# EAGLE board Zwaard_met_Triple7Seg-with-enc-R3 (EAGLE 7.7.0)
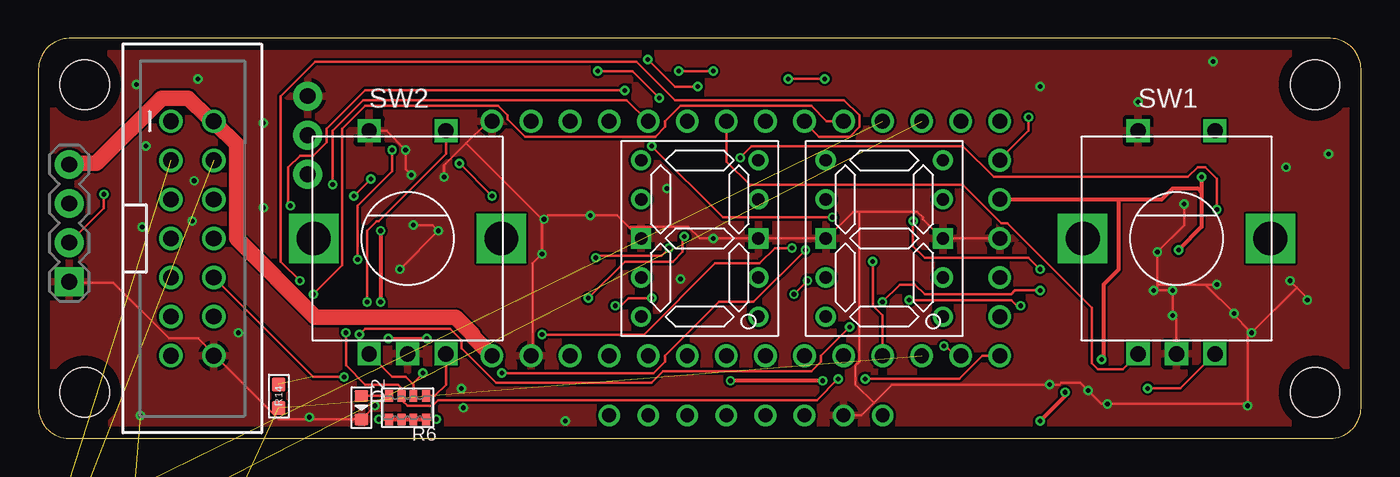
[diagram p0: board, top side]
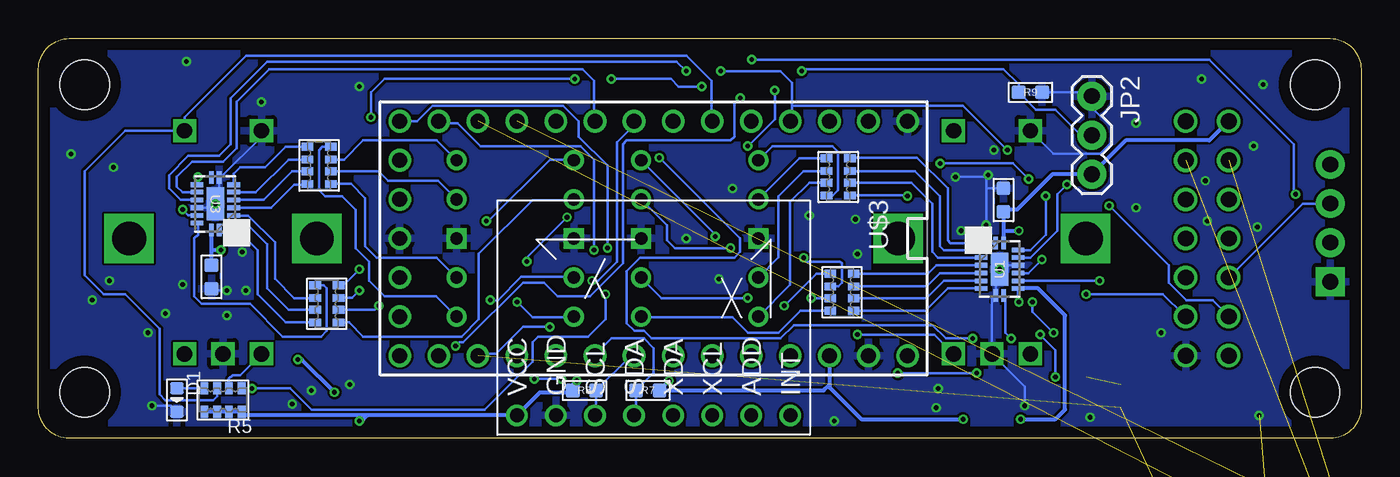
[diagram p1: board, bottom side, seen from below]

Size 86 x 26 mm. Coordinates in mm from the lower left corner, seen from the top.
Outline: 2,0 84,0 arc90 86,2 86,24 arc90 84,26 2,26 arc90 0,24 0,2 arc90 2,0
Copper layers (1*16): Top 0.035mm / dielectric 1.5mm / Bottom 0.035mm
Design rules "ITEADstudio_DRC *": minimum track width 6mil, minimum drill 12mil, track to track 6mil, track to pad 6mil, pad to pad 6mil, via to via 6mil, smd to smd 0mil, copper to edge 30mil, drill to drill 10mil, minimum pad ring 10mil, minimum via ring 6mil, stop-mask expansion 2mil, vias tented up to drill 100mil, thermal gap 10mil
Net classes: 0 default: width 0.178 mm; 2 LEDPOWER: width 0.254 mm; 3 FATLED: width 1 mm
Holes 3.2 mm at 3,3 83,3 3,23 83,23

## Footprints (pad centres in the part's own frame; a part is rotated, then mirrored left to right if it is on the bottom)
C0603 = smd 0.889 x 0.889: 1 -0.762,0; 2 0.762,0
LED0603 = smd 0.762 x 0.889: + -0.762,0; - 0.762,0
1X04 = drill 1.016 pad 1.88 square: 1 0,0 | drill 1.016 pad 1.88: 2 2.54,0; 3 5.08,0; 4 7.62,0
1X03 = drill 1.016 pad 1.88: 1 0,0; 2 2.54,0; 3 5.08,0
R1206-8 = smd 0.508 x 0.762: 1 -1.206,-0.762; 2 -0.381,-0.762; 3 0.381,-0.762; 4 1.206,-0.762; 5 1.206,0.762; 6 0.381,0.762; 7 -0.381,0.762; 8 -1.206,0.762
R0603 = smd 0.889 x 0.889: 1 -0.762,0; 2 0.762,0
ALPS_EC12E_SW = drill 1 square: A -2.5,-7.5; B 2.5,-7.5; C 0,-7.5; D -2.5,7; E 2.5,7 | drill 2.2 square: GND1 -6.1,0; GND2 6.1,0
QFN50P250X350X100-17N = smd 0.305 x 0.813: 1 -0.254,1.702; 8 -0.254,-1.702; 9 0.254,-1.702; 16 0.254,1.702 | smd 0.813 x 0.305: 2 -1.194,1.245; 3 -1.194,0.762; 4 -1.194,0.254; 5 -1.194,-0.254; 6 -1.194,-0.762; 7 -1.194,-1.245; 10 1.194,-1.245; 11 1.194,-0.762; 12 1.194,-0.254; 13 1.194,0.254; 14 1.194,0.762; 15 1.194,1.245 | smd 1.143 x 2.159: 17 0,0
7SEG_500X400MIL = drill 0.8: 1 -3.81,5.08; 2 -3.81,2.54; 3 -3.81,-2.54; 4 -3.81,-5.08; 5 3.81,-5.08; 6 3.81,-2.54; 7 3.81,2.54; 8 3.81,5.08 | drill 0.8 square: GNDA -3.81,0; GNDB 3.81,0
TEENSY_3.0-3.2&LC_OUTER_ROW = drill 0.965: 0 -7.62,13.97; 1 -7.62,11.43; 2 -7.62,8.89; 3 -7.62,6.35; 3.3V 7.62,11.43; 3.3V1 -2.54,-16.51; 4 -7.62,3.81; 5 -7.62,1.27; 6 -7.62,-1.27; 7 -7.62,-3.81; 8 -7.62,-6.35; 9 -7.62,-8.89; 10 -7.62,-11.43; 11 -7.62,-13.97; 12 -7.62,-16.51; 13 7.62,-16.51; 14/A0 7.62,-13.97; 15/A1 7.62,-11.43; 16/A2 7.62,-8.89; 17/A3 7.62,-6.35; 18/A4 7.62,-3.81; 19/A5 7.62,-1.27; 20/A6 7.62,1.27; 21/A7 7.62,3.81; 22/A8 7.62,6.35; 23/A9 7.62,8.89; AGND 7.62,13.97; GND -7.62,16.51; GND1 0,-16.51; PGM 2.54,-16.51; RESET/DAC 5.08,-16.51; VBAT -5.08,-16.51; VIN 7.62,16.51
ACCELBOARD = drill 0.9: ADD -6.35,0; GND 6.35,0; INT -8.89,0; SCL 3.81,0; SDA 1.27,0; VCC 8.89,0; XCL -3.81,0; XDA -1.27,0
2X70SHROUDED_LOCK = drill 1.016: 1 -1.397,7.62; 2 1.397,7.62; 3 -1.397,5.08; 4 1.397,5.08; 5 -1.397,2.54; 6 1.397,2.54; 7 -1.397,0; 8 1.397,0; 9 -1.397,-2.54; 10 1.397,-2.54; 11 -1.397,-5.08; 12 1.397,-5.08; 13 -1.397,-7.62; 14 1.397,-7.62

## Placement (x,y rotation side)
C1  100n  [C0603]  23.25,15.5 90 bottom
C2  100n  [C0603]  74.75,10.5 270 bottom
D1  [LED0603]  77,2.5 270 bottom
D2  [LED0603]  21,2 270 top
JP1  [1X04]  2,10.19 90 top
JP2  [1X03]  17.5,22.25 270 bottom
R1  56  [R1206-8]  34,17 90 bottom
R2  56  [R1206-8]  33.75,9.5 90 bottom
R3  56  [R1206-8]  67.25,8.75 270 bottom
R4  56  [R1206-8]  67.75,17.75 270 bottom
R5  [R1206-8]  74,2.5 180 bottom
R6  [R1206-8]  24,2 180 top
R7  2k  [R0603]  46.38,3.12 180 bottom
R8  2k  [R0603]  50.5,3.12 0 bottom
R9  10k  [R0603]  21.5,22.5 180 bottom
R10  10k  [R0603]  0,-6.62 0 top  (outside the outline)
R11  10k  [R0603]  0,-9.25 0 top  (outside the outline)
R12  10k  [R0603]  6.5,-9.38 0 top  (outside the outline)
R13  10k  [R0603]  9.62,-9.38 0 top  (outside the outline)
R14  10k  [R0603]  15.62,2.75 90 top
SW1  EC12E_SW  [ALPS_EC12E_SW]  74,13 0 top
SW2  EC12E_SW  [ALPS_EC12E_SW]  24,13 0 top
U1  74HCT595BQ  [QFN50P250X350X100-17N]  23.5,11 0 bottom
U3  74HCT595BQ  [QFN50P250X350X100-17N]  74.5,15.25 180 bottom
U$1  7.1SEG  [7SEG_500X400MIL]  43,13 0 top
U$3  TEENSY_LC_OUTER_ROW  [TEENSY_3.0-3.2&LC_OUTER_ROW]  46,13 270 bottom
U$4  7.1SEG  [7SEG_500X400MIL]  55,13 0 top
U$6  ACCELERO  [ACCELBOARD]  46,1.5 180 bottom
U$7  M07X2  [2X70SHROUDED_LOCK]  10,13 0 top

## Library data of the parts
C1 C2 D1 D2 R1-R14 = OPL
JP1 JP2 = SparkFun-Connectors
SW1 SW2 = switch-alps; MPN: EC12E2424407; OC_FARNELL: 1520813; OC_NEWARK: 74M1068
U1 U3 = EurorackModularParts; MPN: 74HCT595BQ; OC_FARNELL: 2164865; OC_NEWARK: 55W4682; PACKAGE: QFN-16; SUPPLIER: NXP
U$1 U$4 = 7Seg
U$3 = Teensy_3_and_LC_Series_Boards_v1.4
U$6 U$7 = zephod-components

## Nets
3.3V [LEDPOWER]: C1.1 C2.1 JP2.3 R5.5 R5.6 R5.7 R5.8 R6.5 R6.6 R6.7 R6.8 R7.1 R8.1 U1.10 U1.16 U3.10 U3.16 U$3.3.3V U$3.3.3V1 U$6.VCC U$7.1
5V [FATLED]: JP1.4 U$3.VIN U$7.2
26/A12/DAC: U$3.RESET/DAC
A: R1.8 U$1.1
A2: R3.8 U$4.1
B: R1.5 U$1.2
B2: R3.5 U$4.2
C: R1.6 U$1.3
C2: R3.6 U$4.3
D: R1.7 U$1.4
D2: R3.7 U$4.4
E: R2.5 U$1.6
E2: R4.5 U$4.6
ENC1_A: R5.2 SW1.A U$3.5
ENC1_B: R5.1 SW1.B U$3.6
ENC1_S: R5.3 SW1.E U$3.4
ENC2_A: R6.2 SW2.A U$3.11
ENC2_B: R6.1 SW2.B U$3.12
ENC2_S: R6.3 SW2.E U$3.13
F: R2.6 U$1.7
F2: R4.6 U$4.7
G: R2.7 U$1.8
G2: R4.7 U$4.8
GND: C1.2 C2.2 D1.- D2.- JP1.1 JP2.1 R9.1 R12.1 SW1.C SW1.D SW2.C SW2.D U1.8 U1.13 U1.17 U3.8 U3.13 U3.17 U$1.GNDA U$1.GNDB U$3.AGND U$3.GND U$3.GND1 U$4.GNDA U$4.GNDB U$6.GND U$7.14
H: R2.8 U$1.5
H2: R4.8 U$4.5
LED1: R10.1 U$3.9
LED1OUT: R10.2 U$7.3
LED2: R11.1 U$3.10
LED2OUT: R11.2 U$7.4
LED_DATA_OUT: JP1.2 U$3.VBAT
LED_NAAR_RING: JP1.3 U$7.9
LEDCLK: U1.11 U3.11 U$3.7
LEDDAT: U1.14 U$3.3
LEDLATCH: U1.12 U3.12 U$3.2
MIDI_RX: U$3.0
MIDI_TX: U$3.1
N$1: D1.+ R5.4
N$2: D2.+ R6.4
N$3: U$3.PGM
N$4: R1.4 U1.1
N$5: R1.3 U1.2
N$6: R1.2 U1.3
N$7: R2.4 U1.4
N$8: R2.3 U1.5
N$9: R2.2 U1.6
N$10: R2.1 U1.7
N$11: R1.1 U1.15
N$12: R3.4 U3.1
N$13: R3.3 U3.2
N$14: R3.2 U3.3
N$15: R4.4 U3.4
N$16: R4.3 U3.5
N$17: R4.2 U3.6
N$18: R4.1 U3.7
N$19: R3.1 U3.15
N$20: R12.2 R13.1
POT1: R14.2 U$7.10
POT_1_IN: R13.2 R14.1 U$3.15/A1
POT_2: U$3.16/A2 U$7.11
SCL: R8.2 U$3.19/A5 U$6.SCL
SDA: R7.2 U$3.18/A4 U$6.SDA
SEG2DAT: U1.9 U3.14
SOFTPOT: JP2.2 R9.2 U$3.14/A0
SWITCH: U$3.8 U$7.12

## Tracks (layer width: path | path; a pad name or v marks a point on that pad's centre or on a via)
3.3V  (via drill 0.3)
  Top 0.254: v25.88,1.25 R6.8 R6.7 R6.6 R6.5 22.14,1.24 v22.12,1.25 | v75.62,17 75.62,16 | 75.62,16 75.62,13.75 v74.12,12.25 | v51,3.75 v45,3.75 | v22.25,13.5 v22.25,8.88 | U$3.3.3V1 70.23,15.54 | 70.23,15.54 73.04,15.54 73.75,16.25 75.38,16.25 75.62,16 | 70.23,15.54 70.23,10.98 69.25,10 69.25,5.25 v69.12,5.12 | v66.75,3 66.75,2.75 v65.12,1.12
  Bottom 0.254: R5.5 R5.6 R5.7 R5.8 72.56,1.5 65.12,1.5 | U$3.3.3V 34.57,3.5 | 34.57,3.5 34.57,3.32 32.5,1.25 v25.88,1.25 | C2.1 74.75,12.25 | 74.75,12.25 U3.16 | U3.10 75.69,16.93 v75.62,17 | v74.12,12.25 74.75,12.25 | 64.62,1.5 U$6.VCC 53.39,3 51.39,3 R8.1 51.26,3.49 v51,3.75 | 64.62,1.5 65.12,1.5 | U$7.1 8.63,20.62 9.88,19.38 15.29,19.38 JP2.3 20.08,17.17 22.38,14.88 23.11,14.88 C1.1 23.25,13.5 | 23.25,13.5 U1.16 | v45,3.75 45,3.74 R7.1 34.95,3.12 34.57,3.5 | v22.12,1.25 19.88,1.25 19.25,1.88 19.25,8 21,9.75 U1.10 22.25,9.7 v22.25,8.88 | 23.25,13.5 v22.25,13.5 | 65.12,1.5 v65.12,1.12 65,1.12 64.62,1.5 | v69.12,5.12 68.88,5.12 v66.75,3
5V
  Top 1: U$3.VIN 29.38,5.5 28.25,6.62 28.25,6.75 27.12,7.88 18,7.88 12.88,13 12.88,19.12 11.5,20.5 U$7.2 11,20.88 9.75,22.12 8,22.12 3.75,17.88 2,17.88 JP1.4
A
  Bottom 0.178: R1.8 34.33,15.79 34,16.12 34,18.62 34.38,19 38.27,19 U$1.1
A2  (via drill 0.3)
  Top 0.178: v65.12,11 64.38,11.75 57.62,11.75 56.88,12.5 v56.88,14.12
  Bottom 0.178: R3.8 66.17,9.96 v65.12,11 | v56.88,14.12 56.75,14.12 52.75,18.12 51.23,18.12 U$4.1
B
  Bottom 0.178: R1.5 36.52,18.21 U$1.2
B2
  Bottom 0.178: R3.5 65.79,7.54 64.88,6.62 58.5,6.62 57.38,7.75 57.38,12 53.88,15.5 51.23,15.5 U$4.2
C
  Bottom 0.178: R1.6 36.24,17.38 37.88,15.75 37.88,11.78 U$1.3
C2  (via drill 0.3)
  Top 0.178: v63.88,8.62 63.62,8.62 63.25,9 v56.62,9
  Bottom 0.178: R3.6 64.13,8.37 v63.88,8.62 | v56.62,9 56.12,9 54.62,10.5 51.23,10.5 U$4.3
D
  Bottom 0.178: R1.7 35.88,16.62 37.12,15.38 37.12,9.98 U$1.4
D2  (via drill 0.3)
  Top 0.178: v65.12,9.62 63.5,9.62 63.25,9.38 57.62,9.38 57,10 56,10 v54.88,8.88
  Bottom 0.178: R3.7 65.62,9.13 v65.12,9.62 | v54.88,8.88 53.88,7.88 51.23,7.88 U$4.4
E  (via drill 0.3)
  Top 0.178: v37.5,8.62 37.88,8.62 38.38,9.12 v39.88,9.12
  Bottom 0.178: R2.5 35.42,10.71 v37.5,8.62 | v39.88,9.12 45.48,9.12 U$1.6
E2
  Bottom 0.178: R4.5 65.67,16.54 64.75,15.62 64.75,12.5 64,11.75 60.1,11.75 U$4.6
ENC1_A
  Top 0.178: SW1.A 70.5,4.5 68.88,4.5 68.5,4.88 68.5,8.5 63,14 62.62,14 60.12,16.5 46.25,16.5 44.75,18 44.75,20.5 U$3.5
  Bottom 0.178: R5.2 73.62,3.88 73.38,4.12 72.88,4.12 SW1.A
ENC1_B  (via drill 0.3)
  Top 0.178: v72.12,3.25 74.25,3.25 SW1.B | v49.12,9.38 v50,10.25
  Bottom 0.178: R5.1 72.14,3.26 v72.12,3.25 69.62,3.25 68.25,1.88 57,1.88 53.88,5 53.88,6.25 53.5,6.62 50.25,6.62 49.12,7.75 v49.12,9.38 | v50,10.25 49.62,10.25 48.38,11.5 48.38,19.25 47.38,20.25 47.38,20.5 U$3.6
ENC1_S
  Bottom 0.178: U$3.4 42.25,20.68 42.25,23.25 43.88,24.88 72.5,24.88 76.5,20.88 SW1.E 80.38,20 83,17.38 83,10.62 81.75,9.38 80.38,9.38 78.12,7.12 78.12,2.88 77.75,2.5 74.62,2.5 74.38,2.74 R5.3
ENC2_A  (via drill 0.3)
  Top 0.178: R6.2 24.38,3.49 24.31,3.56 | 24.31,3.56 23.88,4 23,4 SW2.A | v49.88,12.25 46.5,8.88 44.25,8.88 40.75,5.38 40.75,5 40,4.25 v30.12,4.25 | 24.31,3.56 v25,4.25
  Bottom 0.178: v49.88,12.25 49.88,18.12 50.75,19 57.25,19 58.75,20.5 59.88,20.5 U$3.11 | v25,4.25 v30.12,4.25
ENC2_B  (via drill 0.3)
  Top 0.178: R6.1 25.76,2.76 26.5,3.5 SW2.B | v49,12.38 47.88,12.38 46.88,11.38 44,11.38 39.38,6.75 v32.75,6.75
  Bottom 0.178: v49,12.38 49,17.75 50.88,19.62 50.88,20.62 51.88,21.62 60.38,21.62 61.38,20.62 U$3.12 | v32.75,6.75 27.75,6.75 SW2.B
ENC2_S  (via drill 0.3)
  Top 0.178: 20,7 v20,6.88 20,4.75 21.25,3.5 23.38,3.5 23.62,3.26 R6.3 23.62,2.5 24,2.12 25.62,2.12 26,2.5 50.62,2.5 v52,3.88 | v53.75,3.88 59.88,3.88 61.38,5.38 U$3.13 | SW2.E 26.5,18.5 22.12,14.12 22,14.12 21.38,13.5 v21.38,8.88
  Bottom 0.178: v52,3.88 v53.75,3.88 | v21.38,8.88 21.38,8.25 v20,6.88
F  (via drill 0.3)
  Top 0.178: v36.25,11.75 36.38,11.88 40.5,11.88 v41,12.38
  Bottom 0.178: R2.6 33.99,9.88 33.75,10.12 33.75,11.38 33.88,11.5 36,11.5 v36.25,11.75 | v41,12.38 44.62,12.38 45.12,12.88 45.12,13.86 U$1.7
F2
  Bottom 0.178: R4.6 63.87,17.37 63.25,16.75 60.02,16.75 U$4.7
G  (via drill 0.3)
  Top 0.178: v35.75,9.12 38.12,11.5 41.25,11.5 41.88,12.12 41.88,13 v42,13.12
  Bottom 0.178: R2.7 v35.74,9.12 v35.75,9.12 | v42,13.12 42,13.27 U$1.8
G2
  Bottom 0.178: R4.7 66.12,18.13 64.88,19.38 60.1,19.38 U$4.8
GND  (via drill 0.3)  (1 unrouted)
  Top 0.178: 81.81,9.81 82.5,9.12 v82.5,9 | 81.81,9.81 v81.38,10.25 | 72.75,9.62 v73.75,9.62 v73.75,8 74,7.75 SW1.C | 72.75,9.62 72.75,10 | 72.75,10 v72.75,12.12 74.5,13.88 U3.17 | 72.75,9.62 v72.5,9.62 | 72.75,10 75.88,10 | 75.88,10 v76.62,10 | 75.88,10 v77.75,8.12 77.62,8.12 v78.88,6.88 | v78.88,6.88 81.81,9.81 | 78.62,2.25 78.62,7 v78.88,6.88 | 78.62,2.25 v69.5,2.25 69.12,2.25 v68.25,3.12 67.75,3.62 66.5,3.62 66.38,3.5 v65.75,3.5 55.5,3.5 54.31,2.31 | 78.62,2.25 v78.62,2.12 | U$6.GND 53.5,1.5 54.31,2.31 | U$3.GND1 U$4.GNDB 58.75,13 57.5,14.25 57.5,14.38 57.12,14.75 53.38,14.75 | v32.88,14.25 32.75,14.12 v32.75,12 32.12,11.38 32.12,5.5 U$3.AGND | v32.88,14.25 33.12,14.5 v35.88,14.5 37.62,14.5 38.44,13.69 | 38.44,13.69 39.12,13 U$1.GNDA | 38.44,13.69 38.5,13.75 42.25,13.75 43,13 U$1.GNDB U$4.GNDA 51.25,13 53,14.75 53.38,14.75 | D2.- 15.62,1.25 11.5,5.38 U$7.14 11.38,5.5 10.38,6.5 8.5,6.5 4.88,10.12 2,10.12 JP1.1 | v24.38,13.88 25.62,13.88 v26,13.5 U1.17 | v24.25,17.12 23.88,17.5 v23.88,18.75 22.62,20 SW2.D | 27.81,19.19 26.38,17.75 v26.38,17 | 27.81,19.19 29.12,20.5 29.38,20.5 U$3.GND | v21.88,2.12 D2.- | D2.- | 27.81,19.19 32.75,14.25 v32.88,14.25 | 54.31,2.31 53.12,3.5 53.12,4.75 53.38,5 53.38,14.75
  Bottom 0.178: U1.13 23.25,11.25 U1.17 | U1.17 23.5,11.12 23.75,10.88 23.75,10.62 U1.8 23.88,9.25 24,9.12 SW2.C 21.88,3.38 v21.88,2.12 | U1.17 23.62,10.88 23.5,10.88 | 75.75,15 74.75,15 U3.17 74.25,15.5 U3.8 74.12,17 71.5,19.62 SW1.D | 75.88,15 75.75,15 | v78.62,2.12 77.38,2.12 D1.- | 75.75,15 U3.13 | v73.75,9.62 74.75,9.62 C2.2 | R9.1 17.75,22.5 JP2.1 17.5,21.5 16.25,20.25 16.25,19.25 17,18.5 20,18.5 SW2.D | 24.38,17 v26.38,17 | 24.38,17 24.38,16.25 | 24.38,16.25 v24.38,13.88 | 24.38,17 v24.25,17.12 | 24.38,16.25 C1.2
  other vias: 23.5,11 74.5,15.25 65.12,22.88 71.5,21.88 40.88,16.25 43.88,13 41.75,10.38 34.25,1.12 27.62,2 27.5,3.25 17.62,1.38 13,6.88 6.75,13.75 7,19 6.38,23 10.38,23.38 14.62,20.5 14.62,15 10.12,16.75 10,14.12 76.38,24.5 83.88,18.5 81.12,17.62 6.62,1.5
  pour Bottom: -0.62,26.75 87.25,26.75 87.25,-1.5 -1.75,-1.5 -1.75,26.25
  pour Top: -0.12,27.12 87.75,27.12 87.75,-1.12 -1.25,-1.12 -1.25,26.62
H
  Bottom 0.178: R2.8 36.46,8.29 37.88,6.88 39.88,6.88 40.88,7.88 46.77,7.88 U$1.5
H2
  Bottom 0.178: R4.8 67.54,18.96 67.75,18.75 67.75,16.12 67.38,15.75 66.25,15.75 65.38,14.88 65.38,12.38 64.5,11.5 64.5,10.25 63.5,9.25 60.14,9.25 U$4.5
LED1  (1 unrouted)
LED1OUT  (1 unrouted)
LED2  (1 unrouted)
LED2OUT  (1 unrouted)
LED_DATA_OUT  (via drill 0.3)
  Top 0.178: v51.12,23.38 v48.75,23.38 | v42.88,22.88 41.38,22.88 v39.62,24.62 | v4.25,15.88 4.25,14.98 JP1.2 | U$3.VBAT 62.51,18.14 64.38,20 v64.38,20.88
  Bottom 0.178: v51.12,23.38 63.5,23.38 64.38,22.5 v64.38,20.88 | v48.75,23.38 44.88,23.38 44.38,22.88 v42.88,22.88 | v39.62,24.62 9.88,24.62 4.38,19.12 4.38,16 v4.25,15.88
LED_NAAR_RING
  Bottom 0.178: JP1.3 3.79,15.27 U$7.9
LEDCLK  (via drill 0.3)
  Top 0.178: v17,10.25 15.75,11.5 15.75,22.25 18,24.5 38.88,24.5 41.38,22 52.38,22 53.38,21 53.38,20.25 52.75,19.62 50.75,19.62 49.88,20.5 U$3.7
  Bottom 0.178: U3.11 76.64,16.01 77,16.38 77,17 76,18 74,18 73.12,18.88 73.12,21.88 71,24 50.62,24 49.88,23.25 49.88,20.68 U$3.7 | v17,10.25 22.25,10.25 U1.11
LEDDAT  (via drill 0.3)
  Top 0.178: v19.12,16.5 19.12,20 21.12,22 38.25,22 39.62,20.62 U$3.3
  Bottom 0.178: v19.12,16.5 19.75,15.88 19.75,13.5 21.5,11.75 22.25,11.75 U1.14
LEDLATCH  (via drill 0.3)
  Top 0.178: v43.88,23.88 v41.62,23.88 | v20.75,11.62 20.75,15.12 23,17.38 v23,18.75
  Bottom 0.178: U3.12 76.75,15.5 77.5,16.25 77.5,17.12 76.25,18.38 74.25,18.38 73.5,19.12 73.5,22.12 71.12,24.5 44.5,24.5 v43.88,23.88 | v41.62,23.88 37.75,23.88 37,23.12 37,21.62 | 37,21.62 37,20.73 U$3.2 | v20.75,11.62 21.62,10.75 22.25,10.75 U1.12 | v23,18.75 25.88,21.62 37,21.62
N$1
  Bottom 0.178: R5.4 D1.+
N$2
  Top 0.178: R6.4 D2.+
N$4
  Bottom 0.178: U1.1 26.7,12.7 26.88,12.88 26.88,16.25 28.88,18.25 33.2,18.25 R1.4
N$5
  Bottom 0.178: U1.2 27.12,12.24 27.38,12.5 27.38,15.75 29,17.38 R1.3
N$6
  Bottom 0.178: U1.3 27.51,11.76 27.88,12.12 27.88,15.25 29.25,16.62 R1.2
N$7
  Bottom 0.178: U1.4 27.62,11.25 28.17,10.71 R2.4
N$8
  Bottom 0.178: R2.3 28.24,9.88 27.38,10.75 U1.5
N$9
  Bottom 0.178: R2.2 28.26,9.12 27.12,10.25 24.71,10.25 U1.6
N$10
  Bottom 0.178: R2.1 28.33,8.29 26.88,9.75 U1.7
N$11  (via drill 0.3)
  Top 0.178: v29.5,15.75 v27.38,17.88 | v21.62,16.88 v20.5,15.75
  Bottom 0.178: R1.1 29.54,15.79 v29.5,15.75 | v27.38,17.88 22.62,17.88 v21.62,16.88 | v20.5,15.75 20.5,13.25 21.5,12.25 U1.15
N$12
  Bottom 0.178: R3.4 69.92,7.54 71.75,9.38 71.75,12.25 72.88,13.38 74.07,13.38 U3.1
N$13
  Bottom 0.178: R3.3 69.74,8.37 71.12,9.75 71.12,12.62 72.5,14 U3.2
N$14
  Bottom 0.178: U3.3 72.36,14.49 70.62,12.75 70.62,10.38 69.38,9.12 R3.2
N$15
  Bottom 0.178: U3.4 70.88,15 69.38,16.5 68.56,16.5 R4.4
N$16
  Bottom 0.178: U3.5 71.37,15.5 69.5,17.38 R4.3
N$17
  Bottom 0.178: R4.2 69.74,18.13 71.86,16.01 U3.6
N$18
  Bottom 0.178: U3.7 73.31,17.19 72.88,17.62 71.25,17.62 69.92,18.96 R4.1
N$19
  Bottom 0.178: R3.1 67.46,9.96 67.25,9.75 67.25,7 67.62,6.62 70.12,6.62 72.25,8.75 75.38,8.75 75.88,9.25 75.88,13 75.62,13.25 75.62,13.94 U3.15
N$20  (1 unrouted)
POT1  (via drill 0.3)  (1 unrouted)
  Top 0.178: v52.75,7.25 50.88,5.38 50.88,5 50.25,4.38 40.62,4.38 39.88,3.62 29.75,3.62 27.5,5.88 27.5,6.38 26.75,7.12 21.25,7.12 v20.88,6.75 | v19.88,4 17.88,4 11.5,10.38 U$7.10
  Bottom 0.178: 57.38,5.5 56.25,5.5 54.5,7.25 v52.75,7.25 | v20.88,6.75 19.88,5.75 v19.88,4
POT_1_IN  (2 unrouted)
POT_2  (via drill 0.3)
  Top 0.178: v54.25,11.5 54.25,8.62 54.88,8 54.88,5.5 U$3.16/A2 | v51.62,14.38 44.5,14.38 v39.88,19 | v38.12,22.62 21.25,22.62 18.75,20.12 18.75,19.25 17.88,18.38 17,18.38 16.25,17.62 16.25,15.25 v16.38,15.12
  Bottom 0.178: v54.25,11.5 54.25,11.75 v51.62,14.38 | v39.88,19 38.12,20.75 v38.12,22.62 | v16.38,15.12 12.5,11.25 12.5,10.12 11.38,9 9.62,9 8.62,8 U$7.11
SCL
  Bottom 0.178: U$6.SCL 49.74,1.57 R8.2 47.48,5.38 U$3.19/A5
SDA
  Bottom 0.178: U$6.SDA 47.14,1.63 R7.2 46,4.26 46,5.88 46.62,6.5 48.75,6.5 49.81,5.44 U$3.18/A4
SEG2DAT  (via drill 0.3)
  Top 0.178: v25.25,6.5 v22.75,6.5 | v45.62,18.25 46.38,19 60.12,19 62.12,17 74.75,17 75.38,17.62 75.88,17.62 76.62,16.88 v76.62,14.88
  Bottom 0.178: v22.75,6.5 23.12,6.88 23.12,9.25 U1.9 | v25.25,6.5 27,6.5 27.88,7.38 36.88,7.38 37.75,6.5 46.12,6.5 46.62,7 47.25,7 47.75,7.5 47.75,10.88 46.88,11.75 40.75,11.75 40.38,12.12 40.38,13 v45.62,18.25 | v76.62,14.88 76.25,14.5 75.75,14.5 U3.14
SOFTPOT  (via drill 0.3)
  Top 0.178: v36.38,23.88 38.62,23.88 v40.38,22.12 | v58.88,6 59,6 59.5,5.5 59.88,5.5 U$3.14/A0
  Bottom 0.178: JP2.2 18.21,19.71 19.88,21.38 21.14,21.38 R9.2 22.26,23.01 23.25,24 36.25,24 v36.38,23.88 | v58.88,6 58.62,6.25 58.38,6.25 54.5,10.12 53.12,10.12 52.25,9.25 50.12,9.25 48,11.38 48,19.12 47.75,19.38 41,19.38 40.75,19.62 40.75,21.75 v40.38,22.12
SWITCH  (via drill 0.3)
  Top 0.178: v17.88,9.38 19.75,11.25 19.75,20.12 21.25,21.62 29.88,21.62 30.5,21 30.5,20.75 31.62,19.62 40.12,19.62 40.75,20.25 40.75,20.62 41.75,21.62 50.25,21.62 51.25,20.62 52.25,20.62 U$3.8
  Bottom 0.178: v17.88,9.38 12.88,9.38 11.5,8 U$7.12